# EAGLE board touch_paneled (EAGLE 7.2.0)
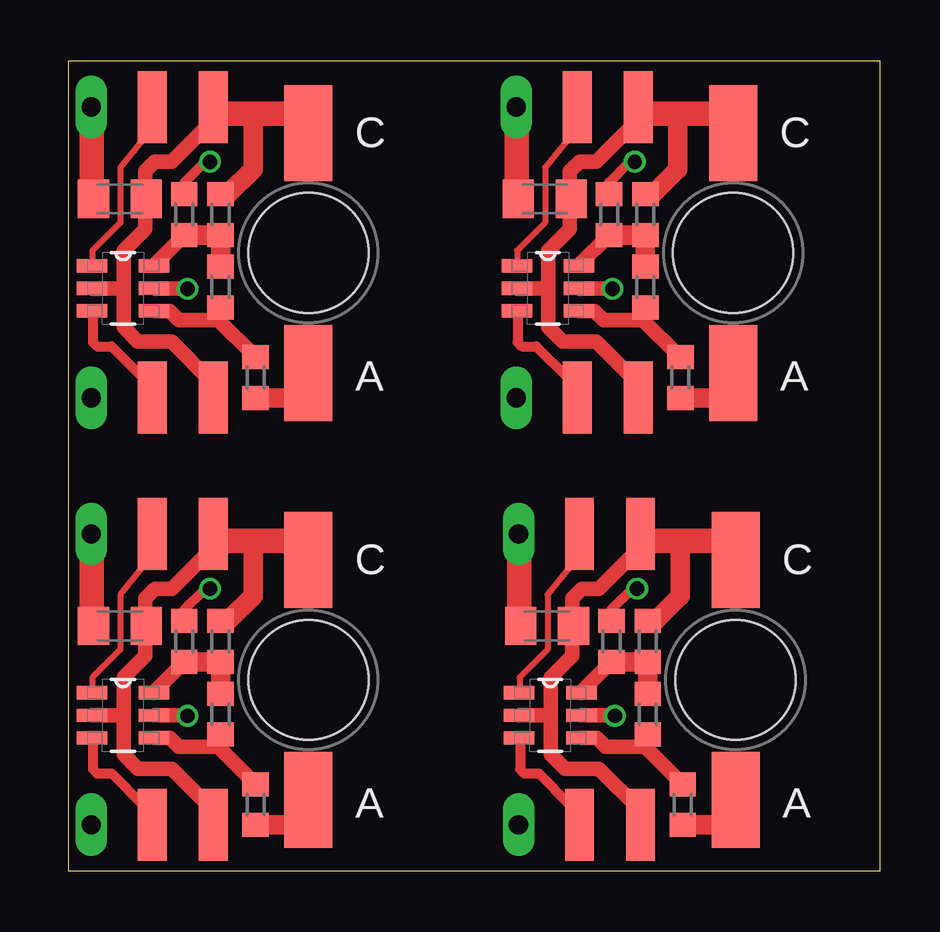
[diagram p0: board, top side]
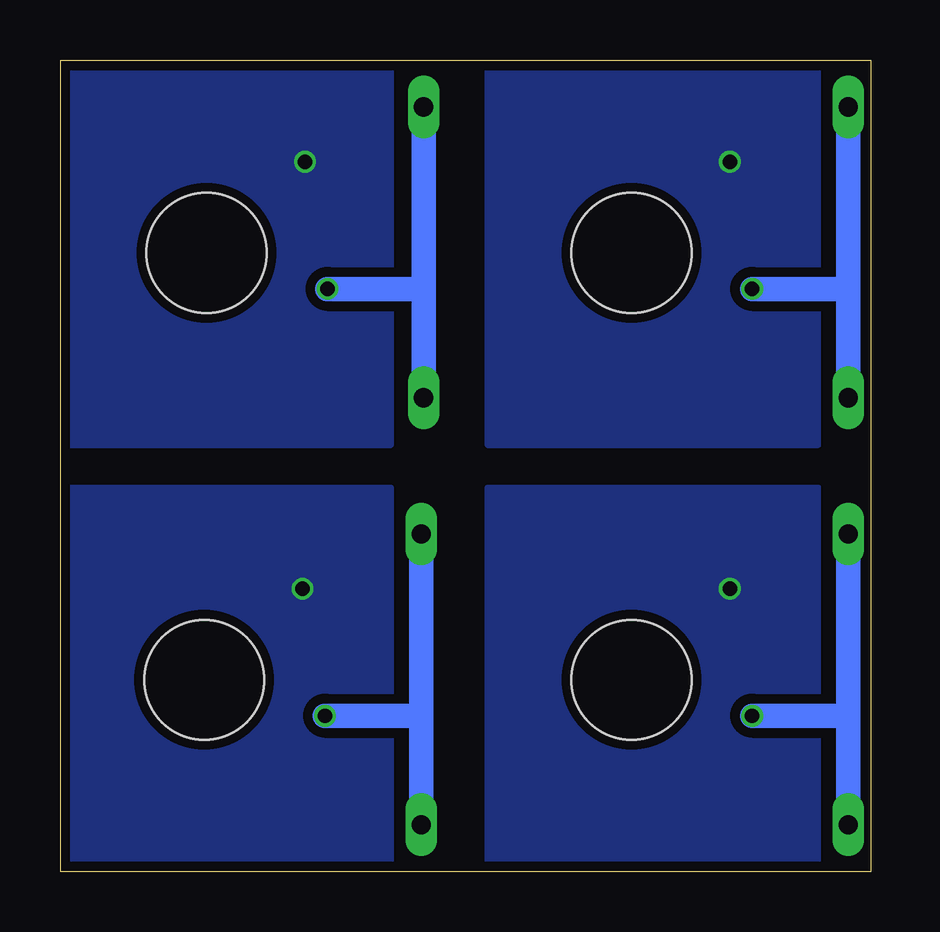
[diagram p1: board, bottom side, seen from below]

Size 33.8 x 33.8 mm. Coordinates in mm from the lower left corner, seen from the top.
Outline: 0,0 0,33.8 33.8,33.8 33.8,0 0,0
Copper layers (1*16): Top 0.035mm / dielectric 1.5mm / Bottom 0.035mm
Design rules "SeeedStudio_2layer_DRU_no_angle_20140221": minimum track width 6mil, minimum drill 12mil, track to track 6mil, track to pad 6mil, pad to pad 6mil, via to via 6mil, smd to smd 0mil, copper to edge 10mil, drill to drill 10mil, minimum pad ring 10mil, minimum via ring 6mil, stop-mask expansion 2mil, vias tented up to drill 100mil, thermal gap 10mil

## Footprints (pad centres in the part's own frame; a part is rotated, then mirrored left to right if it is on the bottom)
C0805K = smd 1.3 x 1.6: 1 -1.1,0; 2 1.1,0
LED_HOLE_4MM = smd 2 x 4: A 0,5; C 0,-5 | hole 5: 0,0
R0603 = smd 1 x 1.1: 1 -0.85,0; 2 0.85,0
SOT95P280X145-6N = smd 1.27 x 0.559: 1 -1.295,0.94; 2 -1.295,0; 3 -1.295,-0.94; 4 1.295,-0.94; 5 1.295,0; 6 1.295,0.94
PINHEAD_1X3 = drill 0.8 pad 1.27 long: P$1 -2.54,0 | smd 1.2 x 3: P$2 0,0; P$3 2.54,0

## Placement (x,y rotation side)
C1  [C0805K]  2.14,10.24 0 top
C2  [C0805K]  19.94,10.24 0 top
C3  [C0805K]  2.14,28.04 0 top
C4  [C0805K]  19.84,28.04 0 top
LED1  [LED_HOLE_4MM]  9.99,7.99 180 top
LED2  [LED_HOLE_4MM]  27.79,7.99 180 top
LED3  [LED_HOLE_4MM]  9.99,25.79 180 top
LED4  [LED_HOLE_4MM]  27.69,25.79 180 top
R1  [R0603]  7.79,2.79 90 top
R2  [R0603]  4.82,9.59 90 top
R3  [R0603]  6.33,6.56 270 top
R4  [R0603]  6.33,9.59 270 top
R5  [R0603]  22.62,9.59 90 top
R6  [R0603]  24.13,6.56 270 top
R7  [R0603]  24.13,9.59 270 top
R8  [R0603]  25.59,2.79 90 top
R9  [R0603]  4.82,27.39 90 top
R10  [R0603]  6.33,24.36 270 top
R11  [R0603]  6.33,27.39 270 top
R12  [R0603]  7.79,20.59 90 top
R13  [R0603]  22.52,27.39 90 top
R14  [R0603]  24.03,24.36 270 top
R15  [R0603]  24.03,27.39 270 top
R16  [R0603]  25.49,20.59 90 top
U1  ATTINY10-TSHR  [SOT95P280X145-6N]  2.27,6.51 0 top
U2  ATTINY10-TSHR  [SOT95P280X145-6N]  20.07,6.51 0 top
U3  ATTINY10-TSHR  [SOT95P280X145-6N]  2.27,24.31 0 top
U4  ATTINY10-TSHR  [SOT95P280X145-6N]  19.97,24.31 0 top
U$1  PINHEAD_SMD_1X3  [PINHEAD_1X3]  3.49,14.07 0 top
U$2  PINHEAD_SMD_1X3  [PINHEAD_1X3]  3.49,1.95 0 top
U$3  PINHEAD_SMD_1X3  [PINHEAD_1X3]  21.29,14.07 0 top
U$4  PINHEAD_SMD_1X3  [PINHEAD_1X3]  21.29,1.95 0 top
U$5  PINHEAD_SMD_1X3  [PINHEAD_1X3]  3.49,31.87 0 top
U$6  PINHEAD_SMD_1X3  [PINHEAD_1X3]  3.49,19.75 0 top
U$7  PINHEAD_SMD_1X3  [PINHEAD_1X3]  21.19,31.87 0 top
U$8  PINHEAD_SMD_1X3  [PINHEAD_1X3]  21.19,19.75 0 top

## Library data of the parts
C1-C4 LED1-LED4 U$1-U$8 = custom
R1-R16 = rcl
U1-U4 = Atmel_By_element14_Batch_1-00; MPN: ATTINY10-TSHR; OC_FARNELL: 1748538; OC_NEWARK: 26R5645; PACKAGE: SOT-23-6; SUPPLIER: Atmel

## Nets
+5V: C1.1 U1.5 U$1.P$1 U$2.P$1
+5V1: C2.1 U2.5 U$3.P$1 U$4.P$1
+5V2: C3.1 U3.5 U$5.P$1 U$6.P$1
+5V3: C4.1 U4.5 U$7.P$1 U$8.P$1
GND: C1.2 LED1.C R4.1 U1.2 U$1.P$3 U$2.P$3
GND1: C2.2 LED2.C R7.1 U2.2 U$3.P$3 U$4.P$3
GND2: C3.2 LED3.C R11.1 U3.2 U$5.P$3 U$6.P$3
GND3: C4.2 LED4.C R15.1 U4.2 U$7.P$3 U$8.P$3
N$1: LED1.A R1.1
N$2: U2.3 U$4.P$2
N$3: R1.2 R3.2 U1.4
N$4: U2.1 U$3.P$2
N$5: U1.3 U$2.P$2
N$6: U1.1 U$1.P$2
N$7: R5.1 R6.1 R7.2 U2.6
N$8: R6.2 R8.2 U2.4
N$9: LED2.A R8.1
N$10: R2.1 R3.1 R4.2 U1.6
N$11: U3.3 U$6.P$2
N$12: U3.1 U$5.P$2
N$13: R9.1 R10.1 R11.2 U3.6
N$14: R10.2 R12.2 U3.4
N$15: LED3.A R12.1
N$16: U4.3 U$8.P$2
N$17: U4.1 U$7.P$2
N$18: R13.1 R14.1 R15.2 U4.6
N$19: R14.2 R16.2 U4.4
N$20: LED4.A R16.1
TOUCH_PAD: R2.2
TOUCH_PAD1: R5.2
TOUCH_PAD2: R9.2
TOUCH_PAD3: R13.2

## Tracks (layer width: path | path; a pad name or v marks a point on that pad's centre or on a via)
+5V  (via drill 0.6 pad 0.25)
  Top 0.61: U1.5 4.94,6.51 v4.96,6.49
  Top 1.016: U$1.P$1 0.97,14.04 0.97,10.4 C1.1
  Bottom 1.016: U$1.P$1 0.95,6.39 | 0.95,6.39 U$2.P$1 | v4.96,6.49 1.05,6.49 0.95,6.39
+5V1  (via drill 0.6 pad 0.25)
  Top 0.61: U2.5 22.74,6.51 v22.76,6.49
  Top 1.016: U$3.P$1 18.77,14.04 18.77,10.4 C2.1
  Bottom 1.016: U$3.P$1 18.75,6.39 | 18.75,6.39 U$4.P$1 | v22.76,6.49 18.85,6.49 18.75,6.39
+5V2  (via drill 0.6 pad 0.25)
  Top 0.61: U3.5 4.94,24.31 v4.96,24.29
  Top 1.016: U$5.P$1 0.97,31.84 0.97,28.2 C3.1
  Bottom 1.016: U$5.P$1 0.95,24.19 | 0.95,24.19 U$6.P$1 | v4.96,24.29 1.05,24.29 0.95,24.19
+5V3  (via drill 0.6 pad 0.25)
  Top 0.61: U4.5 22.64,24.31 v22.66,24.29
  Top 1.016: U$7.P$1 18.68,31.84 18.68,28.2 C4.1
  Bottom 1.016: U$7.P$1 18.65,24.19 | 18.65,24.19 U$8.P$1 | v22.66,24.29 18.75,24.29 18.65,24.19
GND
  Top 0.406: 5.79,13.29 5.79,13.73 U$1.P$3 | LED1.C 9.99,13.29 10.19,13.49 LED1.C | LED1.C 9.69,13.79
  Top 0.61: 5.79,13.29 4.29,11.79 3.59,11.79 3.19,11.39 3.19,10.19 | 7.69,13.59 7.89,13.79 | 3.19,10.19 C1.2 | 3.19,10.19 3.19,8.99 2.29,8.09 2.29,6.39 | 2.29,6.39 2.29,4.89 2.89,4.29 4.29,4.29 5.99,2.59 5.99,1.99 U$2.P$3 | U1.2 2.17,6.51 2.29,6.39
  Top 0.813: R4.1 6.64,10.44 7.69,11.49 7.69,13.59
  Top 1.016: 9.69,13.79 7.89,13.79 6.31,13.79 U$1.P$3
GND1
  Top 0.406: 23.59,13.29 23.59,13.73 U$3.P$3 | LED2.C 27.79,13.29 27.99,13.49 LED2.C | LED2.C 27.49,13.79
  Top 0.61: 23.59,13.29 22.09,11.79 21.39,11.79 20.99,11.39 20.99,10.19 | 25.49,13.59 25.69,13.79 | 20.99,10.19 C2.2 | 20.99,10.19 20.99,8.99 20.09,8.09 20.09,6.39 | 20.09,6.39 20.09,4.89 20.69,4.29 22.09,4.29 23.79,2.59 23.79,1.99 U$4.P$3 | U2.2 19.97,6.51 20.09,6.39
  Top 0.813: R7.1 24.44,10.44 25.49,11.49 25.49,13.59
  Top 1.016: 27.49,13.79 25.69,13.79 24.11,13.79 U$3.P$3
GND2
  Top 0.406: 5.79,31.09 5.79,31.53 U$5.P$3 | LED3.C 9.99,31.09 10.19,31.29 LED3.C | LED3.C 9.69,31.59
  Top 0.61: 5.79,31.09 4.29,29.59 3.59,29.59 3.19,29.19 3.19,27.99 | 7.69,31.39 7.89,31.59 | 3.19,27.99 C3.2 | 3.19,27.99 3.19,26.79 2.29,25.89 2.29,24.19 | 2.29,24.19 2.29,22.69 2.89,22.09 4.29,22.09 5.99,20.39 5.99,19.79 U$6.P$3 | U3.2 2.17,24.31 2.29,24.19
  Top 0.813: R11.1 6.64,28.24 7.69,29.29 7.69,31.39
  Top 1.016: 9.69,31.59 7.89,31.59 6.31,31.59 U$5.P$3
GND3
  Top 0.406: 23.49,31.09 23.49,31.53 U$7.P$3 | LED4.C 27.69,31.09 27.89,31.29 LED4.C | LED4.C 27.39,31.59
  Top 0.61: 23.49,31.09 21.99,29.59 21.29,29.59 20.89,29.19 20.89,27.99 | 25.39,31.39 25.59,31.59 | 20.89,27.99 C4.2 | 20.89,27.99 20.89,26.79 19.99,25.89 19.99,24.19 | 19.99,24.19 19.99,22.69 20.59,22.09 21.99,22.09 23.69,20.39 23.69,19.79 U$8.P$3 | U4.2 19.87,24.31 19.99,24.19
  Top 0.813: R15.1 24.34,28.24 25.39,29.29 25.39,31.39
  Top 1.016: 27.39,31.59 25.59,31.59 24.01,31.59 U$7.P$3
N$1
  Top 0.813: R1.1 9.84,1.94 9.99,1.79 LED1.A
N$2
  Top 0.406: U2.3 18.81,5.57 18.81,4.27 18.99,4.09 19.59,4.09 20.89,2.79 21.09,2.79 21.39,2.49 | 21.39,2.99 21.39,2.49 | 21.39,2.49 21.39,2.05 U$4.P$2
N$3
  Top 0.406: 6.13,5.57 R3.2
  Top 0.61: R3.2 6.19,5.47 6.19,5.24 | 6.19,5.24 R1.2 | U1.4 4.21,5.57 4.59,5.19 6.14,5.19 6.19,5.24
N$4
  Top 0.254: U$3.P$2 21.29,13.19 19.96,11.55 19.96,9.25 18.79,8.09 18.79,7.46 U2.1
N$5
  Top 0.406: U1.3 1.01,5.57 1.01,4.27 1.19,4.09 1.79,4.09 3.09,2.79 3.29,2.79 3.59,2.49 | 3.59,2.99 3.59,2.49 | 3.59,2.49 3.59,2.05 U$2.P$2
N$6
  Top 0.254: U$1.P$2 3.49,13.19 2.16,11.55 2.16,9.25 0.99,8.09 0.99,7.46 U1.1
N$7
  Top 0.406: 21.41,7.4 U2.6
  Top 0.61: U2.6 21.36,7.49 R5.1
  Top 0.813: R6.1 R7.2 R5.1 22.62,8.7
N$8
  Top 0.406: 23.93,5.57 R6.2
  Top 0.61: R6.2 23.99,5.47 23.99,5.24 | 23.99,5.24 R8.2 | U2.4 22.01,5.57 22.39,5.19 23.94,5.19 23.99,5.24
N$9
  Top 0.813: R8.1 27.64,1.94 27.79,1.79 LED2.A
N$10
  Top 0.406: 3.62,7.4 U1.6
  Top 0.61: U1.6 3.56,7.49 R2.1
  Top 0.813: R3.1 R4.2 R2.1 4.82,8.7
N$11
  Top 0.406: U3.3 1.01,23.37 1.01,22.07 1.19,21.89 1.79,21.89 3.09,20.59 3.29,20.59 3.59,20.29 | 3.59,20.79 3.59,20.29 | 3.59,20.29 3.59,19.85 U$6.P$2
N$12
  Top 0.254: U$5.P$2 3.49,30.99 2.16,29.35 2.16,27.05 0.99,25.89 0.99,25.27 U3.1
N$13
  Top 0.406: 3.62,25.2 U3.6
  Top 0.61: U3.6 3.56,25.29 R9.1
  Top 0.813: R10.1 R11.2 R9.1 4.82,26.5
N$14
  Top 0.406: 6.13,23.37 R10.2
  Top 0.61: R10.2 6.19,23.27 6.19,23.04 | 6.19,23.04 R12.2 | U3.4 4.21,23.37 4.59,22.99 6.14,22.99 6.19,23.04
N$15
  Top 0.813: R12.1 9.84,19.74 9.99,19.59 LED3.A
N$16
  Top 0.406: U4.3 18.71,23.37 18.71,22.07 18.89,21.89 19.49,21.89 20.79,20.59 20.99,20.59 21.29,20.29 | 21.29,20.79 21.29,20.29 | 21.29,20.29 21.29,19.85 U$8.P$2
N$17
  Top 0.254: U$7.P$2 21.19,30.99 19.86,29.35 19.86,27.05 18.69,25.89 18.69,25.27 U4.1
N$18
  Top 0.406: 21.32,25.2 U4.6
  Top 0.61: U4.6 21.27,25.29 R13.1
  Top 0.813: R14.1 R15.2 R13.1 22.52,26.5
N$19
  Top 0.406: 23.83,23.37 R14.2
  Top 0.61: R14.2 23.89,23.27 23.89,23.04 | 23.89,23.04 R16.2 | U4.4 21.91,23.37 22.29,22.99 23.84,22.99 23.89,23.04
N$20
  Top 0.813: R16.1 27.54,19.74 27.69,19.59 LED4.A
TOUCH_PAD  (via drill 0.6 pad 0.25)
  Top 0.406: R2.2 4.82,10.92 5.69,11.79 v5.89,11.79
  pour Bottom (isolate 0.406): 2.2,-0.01 2.2,15.99 15.99,15.99 15.99,-0.01
TOUCH_PAD1  (via drill 0.6 pad 0.25)
  Top 0.406: R5.2 22.62,10.92 23.49,11.79 v23.69,11.79
  pour Bottom (isolate 0.406): 20,-0.01 20,15.99 33.79,15.99 33.79,-0.01
TOUCH_PAD2  (via drill 0.6 pad 0.25)
  Top 0.406: R9.2 4.82,28.72 5.69,29.59 v5.89,29.59
  pour Bottom (isolate 0.406): 2.2,17.79 2.2,33.79 15.99,33.79 15.99,17.79
TOUCH_PAD3  (via drill 0.6 pad 0.25)
  Top 0.406: R13.2 22.52,28.72 23.39,29.59 v23.59,29.59
  pour Bottom (isolate 0.406): 20,17.79 20,33.79 33.69,33.79 33.69,17.79

## Text on the board
_tNames: LED1 | LED1 | R4 | R4 | C1 | C1 | R2 | R2 | R3 | R1 | R3 | R1 | ATTINY10_TOUCH | ATTINY10_TOUCH | LED1 | LED1 | R4 | R4 | C1 | C1 | R2 | R2 | R3 | R1 | R3 | R1 | ATTINY10_TOUCH | ATTINY10_TOUCH